# EAGLE board main_noplane (EAGLE 9.0.0)
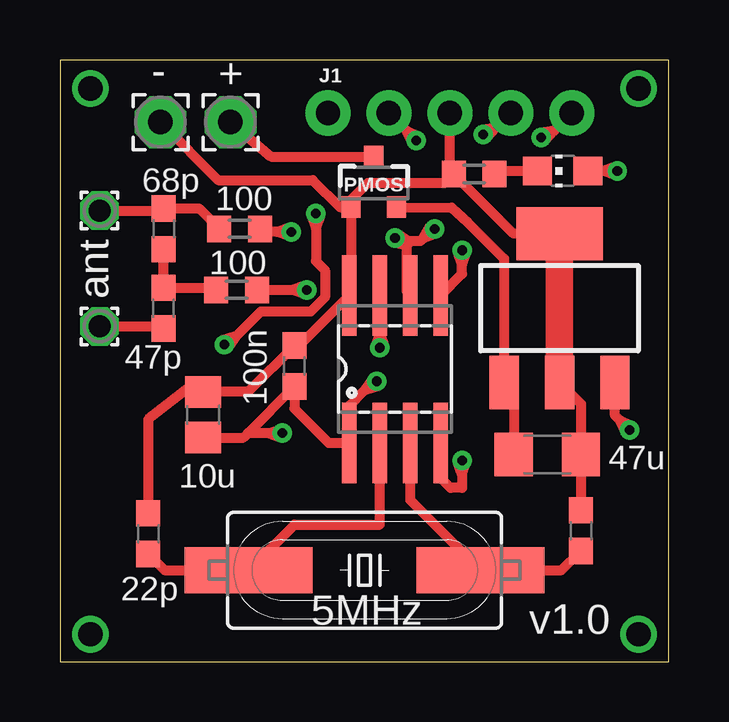
[diagram p0: board, top side]
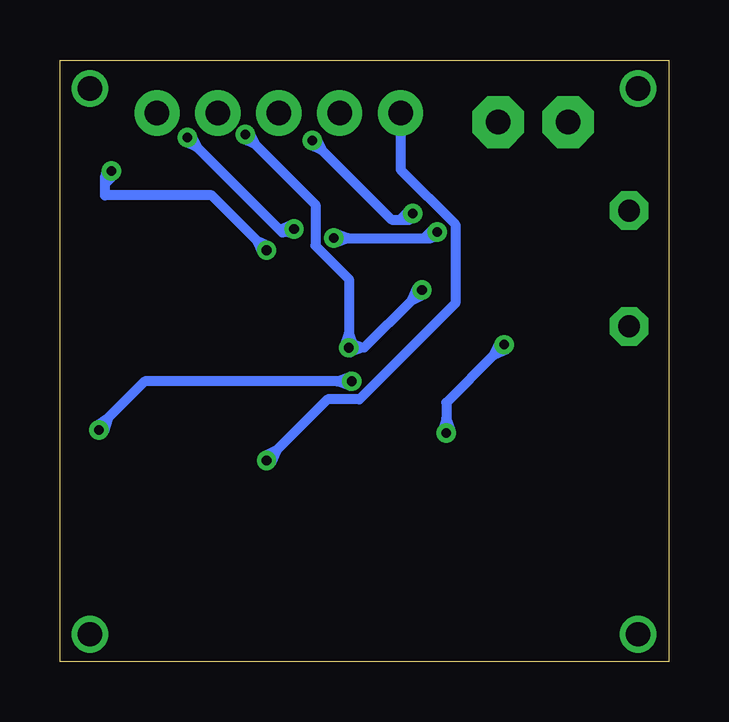
[diagram p1: board, bottom side, seen from below]

Size 25.38 x 25.07 mm. Coordinates in mm from the lower left corner, seen from the top.
Outline: 0,0 25.38,0 25.38,25.07 0,25.07 0,0
Copper layers (1*16): Top 0.035mm / dielectric 1.5mm / Bottom 0.035mm
Design rules "default": minimum track width 6mil, minimum drill 0.35mm, track to track 6mil, track to pad 6mil, pad to pad 6mil, via to via 6mil, smd to smd 6mil, copper to edge 40mil, drill to drill 6mil, minimum pad ring 10mil, minimum via ring 8mil, stop-mask expansion 4mil, vias tented up to drill 0mil, thermal gap 10mil

## Footprints (pad centres in the part's own frame; a part is rotated, then mirrored left to right if it is on the bottom)
2,15/1,0 = drill 1.016 pad 2.159 octagon: 1 0,0
C1206 = smd 1.6 x 1.8: 1 -1.4,0; 2 1.4,0
C0805 = smd 1.3 x 1.5: 1 -0.95,0; 2 0.95,0
C0603 = smd 1.1 x 1: 1 -0.85,0; 2 0.85,0
SOT223 = smd 1.219 x 2.235: 1 -2.311,-3.099; 2 0,-3.099; 3 2.311,-3.099 | smd 3.6 x 2.2: 4 0,3.099
1X05_NO_SILK = drill 1.016 pad 1.88: 1 0,0; 2 2.54,0; 3 5.08,0; 4 7.62,0; 5 10.16,0
CHIP-LED0805 = smd 1.2 x 1.2: A 0,-1.05; C 0,1.05
1,6/0,9 = drill 0.914 pad 1.6 octagon: 1 0,0
SOT23-3 = smd 0.8 x 0.9: 1 -0.95,-1; 2 0.95,-1; 3 0,1.1
HC49UP = smd 5.334 x 1.93: 1 -4.826,0; 2 4.826,0
R0603 = smd 1 x 1.1: 1 -0.85,0; 2 0.85,0
SO08-UNIVERSAL = smd 0.61 x 3.353: 1 -1.905,-3.073; 2 -0.635,-3.073; 3 0.635,-3.073; 4 1.905,-3.073; 5 1.905,3.073; 6 0.635,3.073; 7 -0.635,3.073; 8 -1.905,3.073

## Placement (x,y rotation side)
+  WIREPAD2,15/1,0  [2,15/1,0]  7.11,22.48 0 top
-  WIREPAD2,15/1,0  [2,15/1,0]  4.19,22.48 0 top
C1  47u  [C1206]  20.32,8.64 0 top
C2  10u  [C0805]  5.97,10.29 270 top
C3  100n  [C0603]  9.78,12.32 90 top
C4  22p  [C0603]  3.68,5.33 270 top
C5  22p  [C0603]  21.72,5.46 270 top
C6  68p  [C0603]  4.32,18.03 270 top
C7  47p  [C0603]  4.32,14.73 90 top
IC2  [SOT223]  20.83,14.73 0 top
J1  [1X05_NO_SILK]  11.18,22.86 0 top
LED1  [CHIP-LED0805]  20.95,20.45 90 top
PAD3  [1,6/0,9]  1.65,13.97 0 top
PAD4  [1,6/0,9]  1.65,18.8 0 top
PMOS  4.3A/20V/54mΩ  [SOT23-3]  13.08,19.94 0 top
Q2  5MHz  [HC49UP]  12.7,3.81 180 top
R1  100  [R0603]  7.37,15.49 0 top
R2  100  [R0603]  7.49,18.03 0 top
R3  1K  [R0603]  17.27,20.32 180 top
U1  PIC16F18313  [SO08-UNIVERSAL]  13.97,12.19 0 top

## Library data of the parts
+ - PAD3 PAD4 = wirepad
C1-C7 = rcl; SPICEPREFIX: C
IC2 = linear-technology; MPN: LT1129CST-5#PBF; OC_FARNELL: 1663375; OC_NEWARK: 57M2069
J1 = SparkFun-Connectors
LED1 = led
PMOS = SparkFun-DiscreteSemi; PROD_ID: TRANS-11153
Q2 = adafruit; OC_FARNELL: unknown; OC_NEWARK: unknown
R1-R3 = rcl; SPICEPREFIX: R
U1 = SparkFun-Retired

## Nets
GND: -.1 C1.2 C2.1 C3.2 C4.1 C5.1 IC2.2 IC2.4 J1.3 PMOS.1 R3.2 U1.8
N$1: C1.1 IC2.1 PMOS.2
N$2: C6.2 C7.2 R1.1
N$3: C6.1 PAD4.1 R2.1
N$5: LED1.C R3.1
N$6: C7.1 PAD3.1
RA0: J1.4 R1.2 U1.7
RA1: J1.5 R2.2 U1.6
RA2: LED1.A U1.5
RA3: J1.1 U1.4
RA4: C5.2 Q2.1 U1.3
RA5: C4.2 Q2.2 U1.2
VDD: C2.2 C3.1 IC2.3 J1.2 U1.1
VIN: +.1 PMOS.3

## Tracks (layer width: path | path; a pad name or v marks a point on that pad's centre or on a via)
GND
  Top 0.406: -.1 6.6,20.07 10.54,20.07 11.67,18.94 PMOS.1 | IC2.4 18.91,17.83 R3.2 | R3.2 16.26,20.49 J1.3 | R3.2 16.04,19.94 12.83,19.94 12.13,19.24 PMOS.1 | IC2.2 21.72,10.74 C1.2 C5.1 | PMOS.1 12.13,15.33 U1.8 9.97,13.17 C3.2 7.85,11.24 C2.1 5.2,11.23 5.45,11.49 3.68,10.1 C4.1
  Top 1.143: IC2.4 IC2.2
N$1
  Top 0.406: C1.1 18.92,11.23 IC2.1 18.52,16.79 17.02,18.29 16.33,18.92 PMOS.2
N$2
  Top 0.406: R1.1 6.43,15.58 C7.2 C6.2
N$3
  Top 0.406: PAD4.1 4.23,18.8 C6.1 5.79,18.88 R2.1
N$4  (via drill 1.02)
  other vias: 1.27,23.88
N$5
  Top 0.406: R3.1 18.25,20.45 LED1.C
N$6
  Top 0.406: PAD3.1 4.23,13.97 C7.1
N$7  (via drill 1.02)
  other vias: 24.13,23.88
N$8  (via drill 1.02)
  other vias: 1.27,1.14
N$9  (via drill 1.02)
  other vias: 24.13,1.14
RA0  (via drill 0.4)
  Top 0.406: R1.2 9.69,15.49 | 9.69,15.49 v10.29,15.49 | U1.7 13.34,13.68 | 13.34,13.68 v13.34,13.08 | J1.4 18.18,22.25 | 18.18,22.25 17.91,21.97 v17.65,21.97 | 9.69,15.49 10.22,15.3 | v10.29,15.49 10.22,15.3 | 9.69,15.49 10.22,15.68 | v10.29,15.49 10.22,15.68 | 9.69,15.49 10.22,15.3 | 9.69,15.49 10.22,15.68 | 9.69,15.49 10.22,15.3 | v10.29,15.49 10.22,15.3 | 9.69,15.49 10.22,15.68 | v10.29,15.49 10.22,15.68 | 13.34,13.68 13.15,13.15 | v13.34,13.08 13.15,13.15 | 13.34,13.68 13.52,13.15 | v13.34,13.08 13.52,13.15 | 13.34,13.68 13.15,13.15 | 13.34,13.68 13.52,13.15 | 13.34,13.68 13.15,13.15 | v13.34,13.08 13.15,13.15 | 13.34,13.68 13.52,13.15 | v13.34,13.08 13.52,13.15 | 18.18,22.25 | 18.18,22.25 17.62,22.17 | v17.65,21.97 17.62,22.17 | 18.18,22.25 17.8,21.84 | 17.8,21.84 | v17.65,21.97 17.8,21.84 | 18.18,22.25 17.62,22.17 | v17.65,21.97 17.62,22.17 | 18.18,22.25 17.8,21.84 | v17.65,21.97 17.8,21.84
  Bottom 0.406: v10.29,15.49 10.71,15.07 | 10.71,15.07 12.7,13.08 12.73,13.08 | 12.73,13.08 v13.34,13.08 | v17.65,21.97 17.23,21.55 | 17.23,21.55 14.73,19.05 14.73,17.34 13.34,15.95 13.34,13.68 | 13.34,13.68 v13.34,13.08 | 10.71,15.07 10.47,15.58 v10.29,15.49 | 10.71,15.07 10.2,15.31 v10.29,15.49 | 12.73,13.08 13.27,12.89 | v13.34,13.08 13.27,12.89 | 12.73,13.08 13.27,13.27 | v13.34,13.08 13.27,13.27 | 13.34,13.68 13.15,13.15 | v13.34,13.08 13.15,13.15 | 13.34,13.68 13.52,13.15 | v13.34,13.08 13.52,13.15 | 12.73,13.08 13.27,12.89 | 12.73,13.08 13.27,13.27 | 12.73,13.08 13.27,12.89 | v13.34,13.08 13.27,12.89 | 12.73,13.08 13.27,13.27 | v13.34,13.08 13.27,13.27 | 13.34,13.68 13.15,13.15 | 13.34,13.68 13.52,13.15 | 13.34,13.68 13.15,13.15 | v13.34,13.08 13.15,13.15 | 13.34,13.68 13.52,13.15 | v13.34,13.08 13.52,13.15 | 17.23,21.55 17.74,21.79 v17.65,21.97 | 17.23,21.55 17.47,22.06 v17.65,21.97
RA1  (via drill 0.4)
  Top 0.406: U1.6 14.48,15.39 14.48,17.33 | 14.48,17.33 14.48,17.4 14.35,17.53 | v13.97,17.65 14.22,17.65 14.35,17.53 | v9.65,17.91 9.05,17.91 | 9.05,17.91 8.47,17.91 R2.2 | J1.5 20.6,22.12 | 20.6,22.12 20.32,21.84 v20.07,21.84 | v15.62,18.03 15.16,17.65 | 15.16,17.65 15.02,17.53 14.56,17.53 | 14.56,17.53 14.35,17.53 | 14.48,17.33 14.13,17.78 v13.97,17.65 | 14.48,17.33 13.93,17.46 v13.97,17.65 | 14.56,17.53 14.07,17.82 v13.97,17.65 | 14.56,17.53 13.99,17.45 v13.97,17.65 | 9.05,17.91 9.59,17.72 | v9.65,17.91 9.59,17.72 | 9.05,17.91 9.59,18.1 | v9.65,17.91 9.59,18.1 | 9.05,17.91 9.59,17.72 | 9.05,17.91 9.59,18.1 | 9.05,17.91 9.59,17.72 | v9.65,17.91 9.59,17.72 | 9.05,17.91 9.59,18.1 | v9.65,17.91 9.59,18.1 | 20.6,22.12 | 20.6,22.12 20.04,22.04 | v20.07,21.84 20.04,22.04 | 20.6,22.12 20.21,21.71 | 20.21,21.71 | v20.07,21.84 20.21,21.71 | 20.6,22.12 20.04,22.04 | v20.07,21.84 20.04,22.04 | 20.6,22.12 20.21,21.71 | v20.07,21.84 20.21,21.71 | 15.16,17.65 15.69,17.85 v15.62,18.03 | 15.16,17.65 15.45,18.14 v15.62,18.03
  Bottom 0.406: v13.97,17.65 13.37,17.65 | 13.37,17.65 10.2,17.65 | 10.2,17.65 9.91,17.65 v9.65,17.91 | v20.07,21.84 19.64,21.42 | 19.64,21.42 16.22,18 | 16.22,18 16.1,17.88 v15.62,18.03 | 13.37,17.65 13.9,17.46 | v13.97,17.65 13.9,17.46 | 13.37,17.65 13.9,17.84 | v13.97,17.65 13.9,17.84 | 13.37,17.65 13.9,17.46 | 13.37,17.65 13.9,17.84 | 13.37,17.65 13.9,17.46 | v13.97,17.65 13.9,17.46 | 13.37,17.65 13.9,17.84 | v13.97,17.65 13.9,17.84 | 10.2,17.65 9.79,18.05 v9.65,17.91 | 10.2,17.65 9.63,17.71 v9.65,17.91 | 19.64,21.42 20.15,21.66 v20.07,21.84 | 19.64,21.42 19.89,21.93 v20.07,21.84 | 16.22,18 15.7,18.22 v15.62,18.03 | 16.22,18 15.68,17.84 v15.62,18.03
RA2  (via drill 0.4)
  Top 0.406: U1.5 16.76,16.15 16.76,16.55 | 16.76,16.55 v16.76,17.14 | v23.24,20.45 22.64,20.45 | 22.64,20.45 LED1.A | 16.76,16.55 16.95,17.08 | v16.76,17.14 16.95,17.08 | 16.76,16.55 16.57,17.08 | v16.76,17.14 16.57,17.08 | 16.76,16.55 16.95,17.08 | 16.76,16.55 16.57,17.08 | 16.76,16.55 16.95,17.08 | v16.76,17.14 16.95,17.08 | 16.76,16.55 16.57,17.08 | v16.76,17.14 16.57,17.08 | 22.64,20.45 23.17,20.26 | v23.24,20.45 23.17,20.26 | 22.64,20.45 23.17,20.64 | v23.24,20.45 23.17,20.64 | 22.64,20.45 23.17,20.26 | 22.64,20.45 23.17,20.64 | 22.64,20.45 23.17,20.26 | v23.24,20.45 23.17,20.26 | 22.64,20.45 23.17,20.64 | v23.24,20.45 23.17,20.64
  Bottom 0.406: v16.76,17.14 17.19,17.57 | 17.19,17.57 19.05,19.43 23.5,19.43 23.5,19.9 | 23.5,19.9 23.5,20.19 v23.24,20.45 | 17.19,17.57 16.68,17.32 v16.76,17.14 | 17.19,17.57 16.94,17.06 v16.76,17.14 | 23.5,19.9 23.44,20.47 v23.24,20.45 | 23.5,19.9 23.1,20.31 v23.24,20.45
RA3  (via drill 0.4)
  Top 0.406: v16.76,8.38 16.61,8.38 | U1.4 15.88,7.64 16.28,7.24 16.76,7.24 16.76,7.78 | v16.76,8.38 16.76,7.78 | 16.76,7.78 16.95,8.31 | v16.76,8.38 16.95,8.31 | 16.76,7.78 16.57,8.31 | v16.76,8.38 16.57,8.31 | 16.76,7.78 16.95,8.31 | 16.76,7.78 16.57,8.31 | 16.76,7.78 16.95,8.31 | v16.76,8.38 16.95,8.31 | 16.76,7.78 16.57,8.31 | v16.76,8.38 16.57,8.31
  Bottom 0.406: 16.34,8.81 14.22,10.93 12.89,10.93 8.89,14.93 8.89,18.22 11.18,20.5 J1.1 | 16.34,8.81 v16.76,8.38 | 16.34,8.81 16.58,8.3 v16.76,8.38 | 16.34,8.81 16.85,8.56 v16.76,8.38
RA4
  Top 0.406: C5.2 20.92,3.81 Q2.1 14.61,6.73 U1.3
RA5
  Top 0.406: C4.2 4.36,3.81 Q2.2 9.78,5.71 13.34,5.71 U1.2
VDD  (via drill 0.4)
  Top 0.406: C2.2 7.65,9.34 7.83,9.53 | 7.83,9.53 C3.1 9.78,10.54 11.2,9.12 U1.1 12.06,10.67 12.72,11.33 | 12.72,11.33 13.08,11.68 v13.21,11.68 | v23.75,9.65 23.32,10.08 | 23.32,10.08 23.14,10.26 IC2.3 | J1.2 14.44,22.14 | 14.44,22.14 v14.86,21.72 | 7.34,13.56 8.37,14.59 10.46,14.59 11.05,15.18 11.05,16.32 10.67,16.69 10.67,18.07 | 7.34,13.56 6.99,13.21 v6.86,13.21 | v10.67,18.67 10.67,18.07 | v9.27,9.53 8.67,9.53 | 8.67,9.53 7.83,9.53 | 12.72,11.33 | 12.72,11.33 13.27,11.49 | 13.27,11.49 | v13.21,11.68 13.27,11.49 | 12.72,11.33 13.04,11.8 | 12.72,11.33 13.27,11.49 | v13.21,11.68 13.27,11.49 | 12.72,11.33 13.04,11.8 | v13.21,11.68 13.04,11.8 | 23.32,10.08 23.57,9.57 v23.75,9.65 | 23.32,10.08 23.84,9.83 v23.75,9.65 | 14.44,22.14 14.68,21.63 v14.86,21.72 | 14.44,22.14 14.95,21.9 v14.86,21.72 | 10.67,18.07 10.86,18.6 | v10.67,18.67 10.86,18.6 | 10.67,18.07 10.48,18.6 | v10.67,18.67 10.48,18.6 | 10.67,18.07 10.86,18.6 | 10.67,18.07 10.48,18.6 | 10.67,18.07 10.86,18.6 | v10.67,18.67 10.86,18.6 | 10.67,18.07 10.48,18.6 | v10.67,18.67 10.48,18.6 | 7.34,13.56 | 7.34,13.56 6.8,13.4 | 6.8,13.4 | v6.86,13.21 6.8,13.4 | 7.34,13.56 7.02,13.1 | 7.34,13.56 6.8,13.4 | v6.86,13.21 6.8,13.4 | 7.34,13.56 7.02,13.1 | v6.86,13.21 7.02,13.1 | 8.67,9.53 9.2,9.34 | v9.27,9.53 9.2,9.34 | 8.67,9.53 9.2,9.71 | v9.27,9.53 9.2,9.71 | 8.67,9.53 9.2,9.34 | 8.67,9.53 9.2,9.71 | 8.67,9.53 9.2,9.34 | v9.27,9.53 9.2,9.34 | 8.67,9.53 9.2,9.71 | v9.27,9.53 9.2,9.71
  Bottom 0.406: v13.21,11.68 13.81,11.68 | 13.81,11.68 21.84,11.68 23.39,10.13 | 23.39,10.13 23.75,9.78 v23.75,9.65 | v14.86,21.72 14.44,21.29 | 14.44,21.29 11.56,18.41 11.21,18.41 | 11.21,18.41 10.79,18.41 10.79,18.54 v10.67,18.67 | v6.86,13.21 7.28,12.78 | 7.28,12.78 9.27,10.79 9.27,10.12 | 9.27,10.12 v9.27,9.53 | 13.81,11.68 13.28,11.87 | v13.21,11.68 13.28,11.87 | 13.81,11.68 13.28,11.49 | v13.21,11.68 13.28,11.49 | 13.81,11.68 13.28,11.87 | 13.81,11.68 13.28,11.49 | 13.81,11.68 13.28,11.87 | v13.21,11.68 13.28,11.87 | 13.81,11.68 13.28,11.49 | v13.21,11.68 13.28,11.49 | 23.39,10.13 | 23.39,10.13 23.56,9.59 | 23.56,9.59 | v23.75,9.65 23.56,9.59 | 23.39,10.13 23.86,9.82 | 23.39,10.13 23.56,9.59 | v23.75,9.65 23.56,9.59 | 23.39,10.13 23.86,9.82 | v23.75,9.65 23.86,9.82 | 14.44,21.29 14.95,21.54 v14.86,21.72 | 14.44,21.29 14.68,21.8 v14.86,21.72 | 11.21,18.41 10.81,18.81 v10.67,18.67 | 11.21,18.41 10.65,18.47 v10.67,18.67 | 7.28,12.78 7.04,13.29 v6.86,13.21 | 7.28,12.78 6.77,13.03 v6.86,13.21 | 9.27,10.12 9.08,9.59 | v9.27,9.53 9.08,9.59 | 9.27,10.12 9.46,9.59 | v9.27,9.53 9.46,9.59 | 9.27,10.12 9.08,9.59 | 9.27,10.12 9.46,9.59 | 9.27,10.12 9.08,9.59 | v9.27,9.53 9.08,9.59 | 9.27,10.12 9.46,9.59 | v9.27,9.53 9.46,9.59
VIN
  Top 0.406: +.1 8.81,21.04 PMOS.3

## Text on the board
tNames: ant | v1.0